# Altium PCB PCB.PcbDoc
Units mm, origin at the board's own origin, x right, y up, seen from the top; angles counter-clockwise.
Board outline 16 x 25.55 mm, 2 copper layers (Top Layer, Bottom Layer), stack 0.601 mm thick; 7 components, 12 nets, 44 pads, 19 vias.
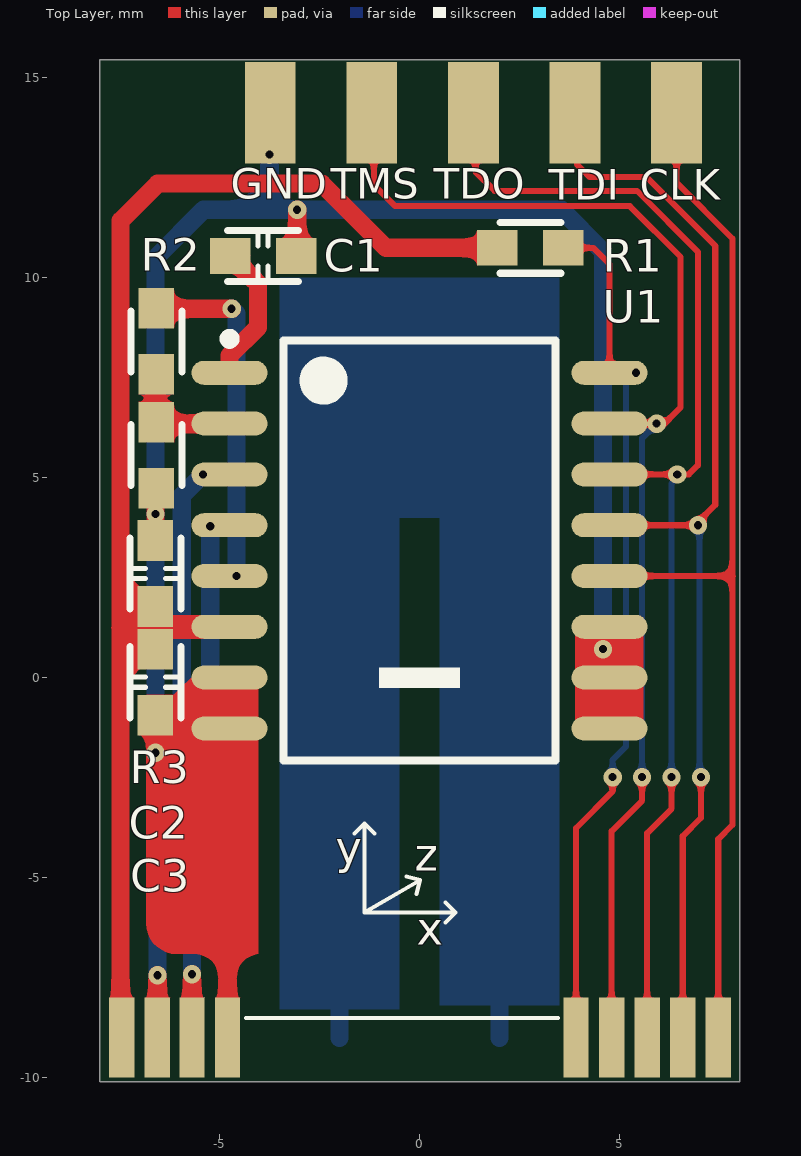
[diagram p0: Top Layer view]
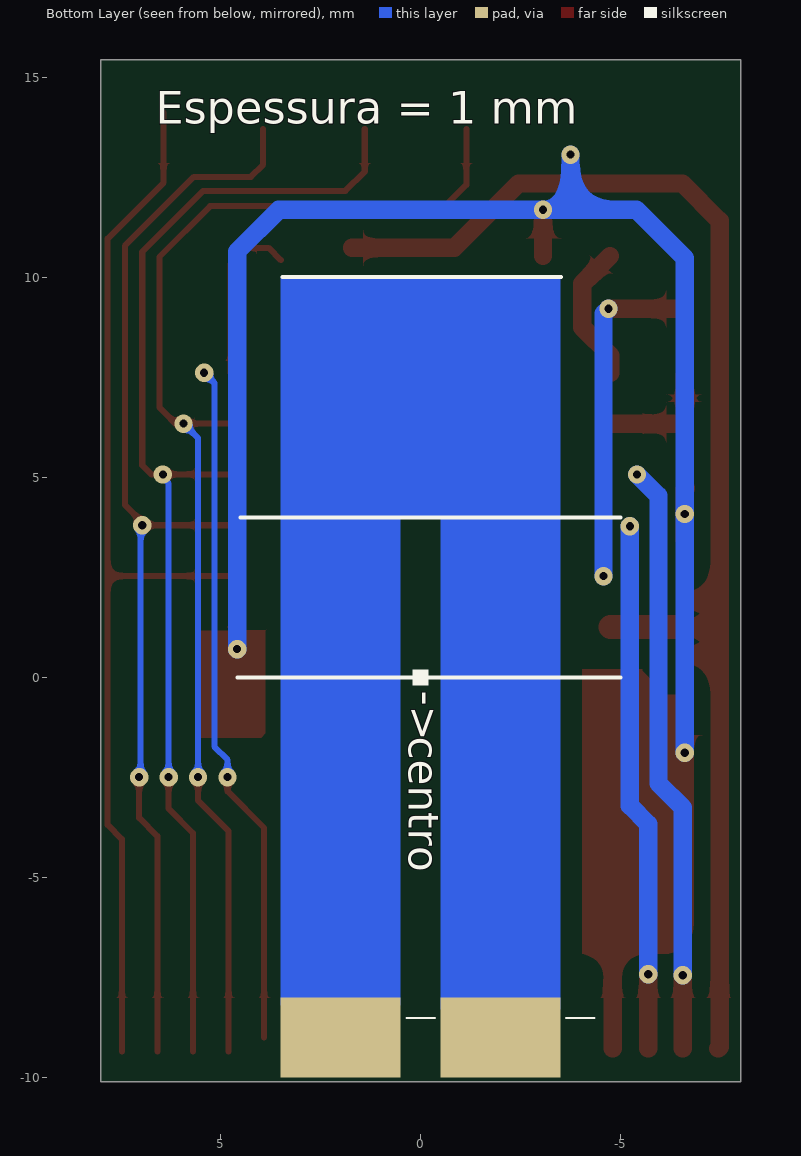
[diagram p1: Bottom Layer view, seen from below]
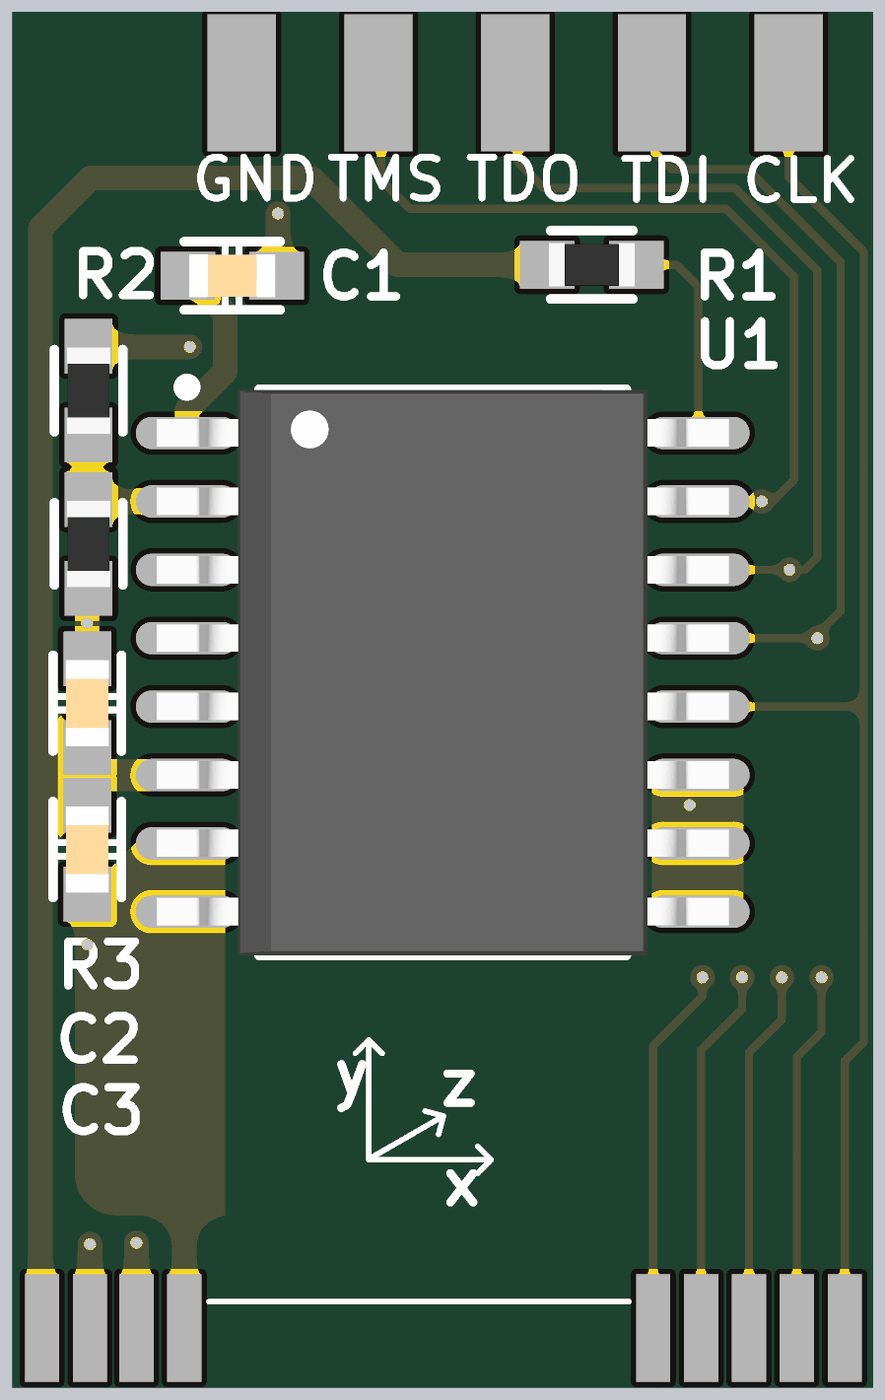
[diagram p2: 3D render of the assembled board from above, using the file's embedded part models]

## Layer stack, top to bottom
Top Solder: solder mask 0.0254, SM-003, Dk 4
Top Layer: signal copper 0.0356
Dielectric 1: core 0.53, Core-033, Dk 4.7
Bottom Layer: signal copper 0.0356
Bottom Solder: solder mask 0.0254, SM-003, Dk 4

## Board outline
-8,-10.109 -8,15.443 8,15.443 8,-10.109

## Design rules (kind name [scope] priority, off if disabled: settings)
Clearance [All] p1: gap=0.2 ignorepadtopadclearanceinfootprint=FALSE
PolygonConnect [All] p1: connectstyle=Relief reliefconductorwidth=0.254 reliefentries=4 polygonreliefangle="90 Angle" airgapwidth=0.254
RoutingVias [All] p1: holewidth=0.711 width=1.27 viastyle="Through Hole" minholewidth=0.2 minwidth=0.45 maxholewidth=3 maxwidth=2
SolderMaskExpansion [All] p1: expansion=0.102
Width [All] p1: maxlimit=2539.975 minlimit=0.127 preferedwidth=0.254 toplayer_maxwidth=254 minimp=50.000000 maximp=50.000000 favimp=50.000000
30 further rules are at their usual default settings.

## Components (designator, comment, footprint, x,y, rotation, side; value= is the part's Value field where it differs from the comment)
C1 "0603" 0603C -3.912,10.541 r0 top value=100nF
C2 "0603" 0603C -6.604,2.603 r90 top value=100nF
C3 "0603" 0603C -6.604,-0.114 r270 top value=4.7uF
R1 "0603" 0603 2.769,10.744 r180 top value=3.3k
R2 "0603" 0603 -6.579,8.407 r90 top value=22k
R3 "0603" 0603 -6.579,5.563 r90 top value=22k
U1 "CFS1000" SO16w 0,3.175 r0 top

## Footprints (in the part's own frame and the unit in brackets; to place one, negate y for a bottom-side part, rotate by r counter-clockwise, add the part's x,y. Pads: shape width x height; smd on the part's side, far side on the other; paste and mask are expansions set on the pad)
0603 [mil]
  rect 40x35 smd: 1(-32.5,0) 2(32.5,0)
  silkscreen extent -30,-25 30,25, body extent -31,-16 32,16, height 16
0603C [mil]
  rect 40x35 smd: 1(-32.5,0) 2(32.5,0)
  silkscreen extent -35,-25 35,25, body extent -32,-16 32,16, height 31
SO16w [mm] "SOP, 28-Leads, Body 10.2x5.3mm, Pitch 0.65mm, IPC Medium Density"
  oval 1.9x0.6 smd: 1(-4.75,4.445) 2(-4.75,3.175) 3(-4.75,1.905) 4(-4.75,0.635) 5(-4.75,-0.635) 6(-4.75,-1.905) 7(-4.75,-3.175) 8(-4.75,-4.445) 9(4.75,-4.445) 10(4.75,-3.175) 11(4.75,-1.905) 12(4.75,-0.635) 13(4.75,0.635) 14(4.75,1.905) 15(4.75,3.175) 16(4.75,4.445)
  silkscreen extent -4.87,-5.25 3.4,5.42, body extent -5.31,-5.25 5.32,5.25, height 2.67

## Part data
C1 C2 C3: library part "Capacitor SMD 0603", "Capacitor SMD 0603"
R1 R2 R3: library part "Resistor SMD 0603 1/10 W", "Resistor SMD 0603 1/10 W", %=±1%, P=1/8W
U1: library part "CI CFS1000", "CFS1000 magneto resistive current sensor", ComponentLink1Description=Documentação, ComponentLink1URL=https://www.sensitec.com/service-support/download/file-category/current

## Free pads (board coordinates)
  rect 1.27x2.54 smd: 8(1.346,14.122) 8(3.886,14.122) ""(-3.734,14.122) ""(-1.194,14.122) ""(6.426,14.122)
  rect 0.635x2 smd: ""(-7.442,-9) ""(-6.553,-9) ""(-5.69,-9) ""(-4.801,-9) ""(3.912,-9) ""(4.801,-9) ""(5.69,-9) ""(6.579,-9) ""(7.468,-9)
  rect 3x2 smd far side: ""(-2,-9) ""(2,-9)

## Via types
v1: diameter 0.457, hole 0.203, Top Layer to Bottom Layer, tented both sides, 19 vias

## Nets (pads, with @x,y where several pads share a name; then routed paths per layer and width w, separated by ;. In a path a pad name is that pad's centre, name@x,y a point inside that pad or via, vN(x,y) a via of type N, cw(c..) or ccw(c..) an arc to the next point about the centre after c; other vN are vias at no path point)
+5V: C2.1 C3.1 pad.@-7.442,-9 R1.2 U1.6 | length 33.7
  Top Layer w0.457: pad.@-7.442,-9.271 -7.477,-9.236 -7.477,1.245 ; -6.604,1.245 -7.477,1.245 ; R1.2@1.714,10.744 -0.838,10.744 -2.448,12.354 -6.544,12.354 -7.477,11.421 -7.477,1.245
  Top Layer w0.597: -6.604,1.245 -6.579,1.27 U1.6
CLK: pad.@6.426,14.122 pad.@7.468,-9 U1.12 | length 27.3
  Top Layer w0.152: U1.12 7.823,2.54 ; pad.@6.426,14.122 6.426,12.373 7.823,10.976 7.823,2.54 ; pad.@7.468,-9.347 7.468,-9 7.468,-4.039 7.823,-3.683 7.823,2.54
Fb: pad.@-5.69,-9 U1.4 | length 13.2
  Top Layer w0.457: pad.@-5.69,-9.271 v1(-5.69,-7.417)
  Bottom Layer w0.457: v1(-5.69,-7.417) -5.69,-3.658 -5.232,-3.2 v1(-5.232,3.785)
GND: C1.2 C2.2 C3.2 pad.@-3.734,14.122 pad.@-4.801,-9 R3.1 U1.7 U1.8 U1.9 U1.10 U1.11 | length 49.8
  Top Layer w0.152: U1.8 U1.7 ; U1.9 U1.10 4.587,0.163 v1(4.587,0.711) 4.587,1.107 U1.11
  Top Layer w0.457: R3.1@-6.629,4.737 -6.604,4.712 v1(-6.604,4.089) C2.2 ; v1(-6.604,-1.88) -6.604,-1.041 -6.553,-0.991 C3.2 ; -5.74,-0.635 -5.74,-0.891 -5.362,-1.27 U1.8 ; pad.@-4.801,-9.271 -4.801,-9 -4.801,-4.114 ; C1.2@-3.061,10.541 v1(-3.061,11.697)
  Bottom Layer w0.457: v1(-6.604,-1.88) v1(-6.604,4.089) -6.604,10.49 -5.397,11.697 -3.75,11.697 ; v1(-3.75,13.075) -3.75,11.697 ; v1(4.587,0.711) 4.587,10.653 3.543,11.697 v1(-3.061,11.697) -3.75,11.697
Iout: pad.@-6.553,-9 U1.3 | length 14.8
  Top Layer w0.457: pad.@-6.553,-9.271 v1(-6.553,-7.442)
  Bottom Layer w0.457: v1(-6.553,-7.442) -6.553,-3.251 -5.947,-2.645 -5.947,4.543 v1(-5.41,5.08)
NetC1_1: C1.1 U1.1 | length 3.5
  Top Layer w0.457: U1.1 -4.75,8.051 -4.042,8.76 -4.042,9.846 C1.1
NetR2_2: R2.2 U1.5 | length 8.6
  Top Layer w0.457: R2.2 -6.566,9.22 v1(-4.699,9.22)
  Bottom Layer w0.457: v1(-4.699,9.22) -4.575,9.096 v1(-4.575,2.537)
SETTH: R2.1 R3.2 U1.2 | length 3.1
  Top Layer w0.457: R2.1@-6.604,7.556 -6.604,6.337 -6.598,6.344 -4.757,6.344 U1.2
SobreCorrente: pad.@3.912,-9 R1.1 U1.16 | length 21.5
  Top Layer w0.152: R1.1@3.492,10.439 3.797,10.744 4.343,10.744 4.75,10.338 U1.16 ; pad.@3.912,-8.992 3.912,-3.759 4.826,-2.845 v1(4.826,-2.489)
  Bottom Layer w0.152: v1(4.826,-2.489) 4.826,-2.057 5.156,-1.727 5.156,7.366 v1(5.41,7.62)
TDI: pad.8@3.886,14.122 pad.@6.579,-9 U1.13 | length 27.8
  Top Layer w0.152: pad.8@3.937,13.716 3.937,12.827 4.245,12.519 5.667,12.519 7.391,10.795 7.391,4.318 v1@6.921,3.848 ; U1.13 v1@6.807,3.81 ; pad.@6.579,-9.347 6.579,-3.962 7.036,-3.505 v1(7.036,-2.489)
  Bottom Layer w0.152: v1(6.96,3.81) 6.998,3.772 6.998,-2.451 v1(7.036,-2.489)
TDO: pad.8@1.346,14.122 pad.@5.69,-9 U1.14 | length 29.8
  Top Layer w0.152: pad.8@1.397,13.716 1.397,12.649 1.88,12.167 5.436,12.167 6.96,10.643 6.96,5.309 6.731,5.08 v1(6.443,5.08) U1.14 ; pad.@5.69,-9.347 5.69,-3.886 6.299,-3.277 v1(6.299,-2.489)
  Bottom Layer w0.152: v1(6.299,-2.489) 6.299,4.854 6.443,4.998 v1(6.443,5.08)
TMS: pad.@4.801,-9 pad.@-1.194,14.122 U1.15 | length 31.7
  Top Layer w0.152: pad.@-1.143,13.716 -1.143,12.319 -0.61,11.786 5.258,11.786 6.528,10.516 6.528,6.756 6.121,6.35 v1(5.927,6.35) U1.15 ; pad.@4.801,-9.347 4.801,-3.835 5.563,-3.073 v1(5.563,-2.489) ; v1@5.486,-2.489 v1@5.486,-2.464
  Bottom Layer w0.152: v1(5.563,-2.489) 5.563,5.986 v1(5.927,6.35)
copper on no net: | length 33.7
  Bottom Layer w0.457: -2,-9 -2,4.825 -0.4,6.425 1.625,6.425 1.625,0.95 2,0.575 2,-9

## Other copper
Top Layer:
  region net GND: -6.833,-0.432 -6.147,-0.432 -5.537,0.178 -5.537,0.203 -4.039,0.203 -4.039,-6.909 -6.071,-6.909 cw(c-6.071,-6.147) -6.833,-6.147
  region net GND: 3.861,1.194 3.886,1.168 3.886,-1.397 3.988,-1.499 5.486,-1.499 5.588,-1.397 5.588,1.168
Bottom Layer:
  rectangle: 0.5,-8.2 3.5,4.375
  region: -0.5,4.35 -3.5,4.35 -3.5,-8.3 -0.5,-8.3
  rectangle: -3.5,3.988 3.5,10

## Silkscreen, mask and mechanical layers (free items; w line width, h text height)
Top Overlay:
  rectangle: -1.016,-0.254 1.016,0.254
  region: 4.75,0
  lines w0.1: -4.343,-8.509 3.457,-8.509 ; -1.625,-3.9 -1.375,-3.65 ; -1.372,-5.862 0.013,-5.063 ; -1.125,-3.9 -1.375,-3.65 ; -0.328,-4.971 0.013,-5.063 ; -0.078,-5.404 0.013,-5.063 ; 0.65,-6.125 0.9,-5.875 ; 0.65,-5.625 0.9,-5.875 ; -1.375,-3.65 -1.375,-5.875 0.9,-5.875
  text "GND" at -4.725,11.975 h0.76
  text "TMS" at -2.225,11.975 h0.76
  text "TDO" at 0.355,11.975 h0.76
  text "TDI" at 3.225,11.95 h0.76
  text "CLK" at 5.5,11.95 h0.76
  text "y" at -2.1,-4.65 h0.81
  text "z" at -0.125,-4.825 h0.81
  text "x" at -0.075,-6.675 h0.81
Bottom Overlay:
  rectangle: -0.197,-0.203 0.203,0.197
  lines w0.05: -4.343,-8.509 -3.632,-8.509 ; -0.356,-8.509 0.356,-8.509
  lines w0.1: -5,0 4.575,0 ; -5,4 4.5,4 ; -3.505,10.02 3.454,10.02
  text "Espessura = 1 mm" at 6.625,13.85 h0.81
  text "->" at -0.381,-0.33 h0.76 r270
  text "centro" at 0.3,-1.475 h0.76 r90
Bottom Solder:
  rectangle: 0.5,-8 3.5,4
  rectangle: -3.5,3.988 3.5,10
  region: -0.5,4 -3.5,4 -3.5,-8 -0.5,-8

## Dimensions
3.454,10.02 to 3.5,-8 on Bottom Overlay
-5,0 to -5,4 on Bottom Overlay
-5,4 to -3.505,10.02 on Bottom Overlay
-0.6,11.425 to 0.3,11.45 on Bottom Overlay
-3.488,8.647 to 3.5,8.825 on Bottom Overlay